# EAGLE board Component_Test_PCB_v1 (EAGLE 9.7.0)

Size 116.84 x 17.71 mm. Coordinates in mm from the lower left corner, seen from the top.
Outline: 6.99,0 6.99,3.33 arc-180 13.99,3.33 13.99,0 104.33,0 104.33,3.33 arc-180 111.33,3.33 111.33,0 111.81,0 arc3 114.3,2.65 116.84,17.71 2.54,17.71 0,6.51 6.51,0 6.99,0
Copper layers (1*16): Top / Bottom
Stack-up Default Layer Stack: Top User Defined 0.035mm / Dielectric-1 User Defined 1.5mm / Bottom User Defined 0.035mm
Design rules "default": minimum track width 6mil, minimum drill 0.35mm, track to track 6mil, track to pad 6mil, pad to pad 6mil, via to via 6mil, smd to smd 6mil, copper to edge 40mil, drill to drill 6mil, minimum pad ring 10mil, minimum via ring 8mil, stop-mask expansion 4mil, vias tented up to drill 0mil, thermal gap 10mil

## Footprints (pad centres in the part's own frame; a part is rotated, then mirrored left to right if it is on the bottom)
MOLEX_70553-0036_0 = drill 1.016 pad 1.651 long: 1 1.27,6.095; 2 -1.27,6.095
0705530004 = drill 1.016 pad 1.651 long: 1 -1.27,0; 2 1.27,0; 3 3.81,0; 4 6.35,0; 5 8.89,0
2PINPOWERCONNECTOR = drill 1.016 pad 2.032 slot 1.524: P$1 -5.08,0.889; P$2 -10.16,0.889 | hole 2.54: -7.62,3.327 | hole 3.81: -3.81,12.344; -11.43,12.344
4PINCONNECTOR = drill 1.016 pad 1.651 long: P$1 1.27,1.27; P$2 3.81,1.27; P$3 6.35,1.27; P$4 8.89,1.27
RIGHTANGLECONNECTOR = drill 1.016 pad 1.651 long: P1 -7.468,3.404; P2 -4.978,3.404; P3 -2.489,3.404 | hole 2.845: -4.978,9.906

## Placement (x,y rotation side)
J2  MOLEX_70553-0036MOLEX_70553-0036_0_0  [MOLEX_70553-0036_0]  68.58,1.2 0 top
U$1  0705530004  [0705530004]  60.96,7.55 180 top
U$3  2PINPOWERCONNECTOR  [2PINPOWERCONNECTOR]  33.02,1.22 0 top
U$4  4PINCONNECTOR  [4PINCONNECTOR]  36.83,5.01 0 top
U$10  RIGHTANGLECONNECTOR  [RIGHTANGLECONNECTOR]  91.44,2.47 0 top

## Library data of the parts
J2 = Robotics Team; CENTROID_NOT_SPECIFIED: No; DATASHEET: https://upverter.com/datasheet/767c2d91de73b1a1f2117c799fe4325dbec45a2f.pdf; DIGIKEY_DESCRIPTION: CONN 2 Positions Header Connector 0.100" (2.54mm) Through Hole, Right Angle Tin; DIGIKEY_PART_NUMBER: WM4924-ND; LEAD_FREE: yes; MF: Molex; MOUSER_PART_NUMBER: 538-70553-0036; MPN: 70553-0036; PACKAGE: HDR02; PREFIX: J; ROHS: yes; TEMPERATURE_RANGE_HIGH: +105°C; TEMPERATURE_RANGE_LOW: -40°C
U$1 U$3 U$4 U$10 = Robotics Team